# Altium PCB ESB32 with USBC PCB V1-1.PcbDoc (part 2 of 3)
Units mil, origin at the board's own origin, x right, y up, seen from the top; angles counter-clockwise.
Board outline 2700 x 1000 mil, 4 copper layers (L1, L2, L3, L4), stack 61.583 mil thick; 64 components, 73 nets, 299 pads, 161 vias.
Unrouted connection lines stored in the file: 13.
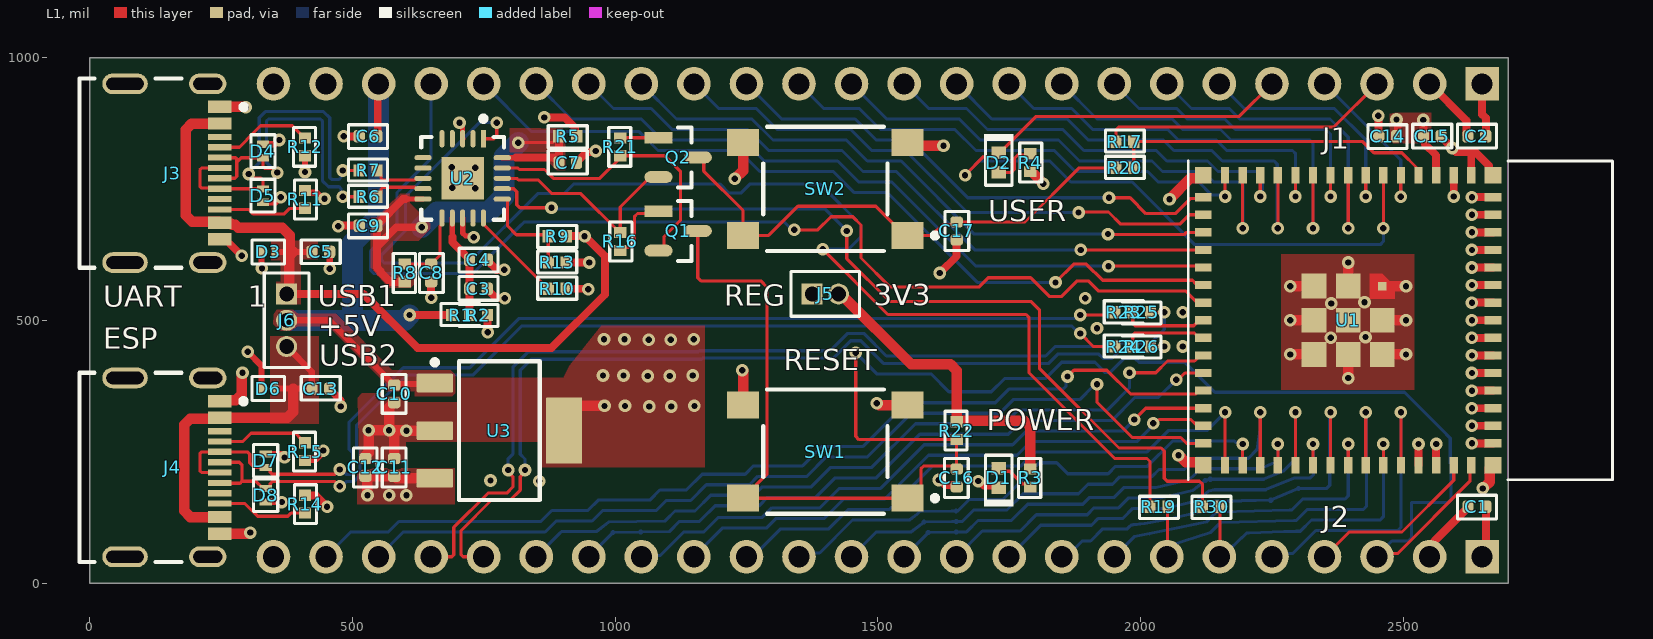
[diagram p0: L1 view]

## Part data (continued)
U2: "IC USB SERIAL FULL UART 20QFN", Case/Package=HVQCCN, LCSC Part number=C132159, Manufacturer=FTDI, Max Operating Temperature=85°C, Max Supply Current=8.4mA, Max Supply Voltage=5.5V, Min Operating Temperature=-40°C, Min Supply Voltage=2.97V, Nominal Supply Voltage=5V, Package Shape=Square, Package Style="CHIP CARRIER, HEAT SINK/SLUG, VERY THIN PROFILEMeter", Power Supplies=3.3/5V, Supplier Part Number=768-1128-1-ND, Temperature Grade=INDUSTRIAL, Category="Interface ICs", ComponentLink1Description=https://datasheet.ciiva.com:443/pdfs/VipMasterIC/IC/FTDI/FTDIS00099/FTDIS00099-1.pdf?src-supplier=IHS+Markit, ComponentLink1URL=https://datasheet.ciiva.com:443/pdfs/VipMasterIC/IC/FTDI/FTDIS00099/FTDIS00099-1.pdf?src-supplier=IHS+Markit, ComponentLink2Description=https://datasheet.ciiva.com/1787/ds-ft231x-1787312.pdf?src-supplier=Digikey, ComponentLink2URL=https://datasheet.ciiva.com/1787/ds-ft231x-1787312.pdf?src-supplier=Digikey, ComponentLink3Description=https://datasheet.ciiva.com/4787/ds-ft231x-13571-4787570.pdf?src-supplier=Mouser, ComponentLink3URL=https://datasheet.ciiva.com/4787/ds-ft231x-13571-4787570.pdf?src-supplier=Mouser, ComponentLink4Description=https://datasheet.ciiva.com/30475/0900766b811020d3-30475405.pdf?src-supplier=Rs, ComponentLink4URL=https://datasheet.ciiva.com/30475/0900766b811020d3-30475405.pdf?src-supplier=Rs, ComponentLink5Description=https://datasheet.ciiva.com/1787/ft-x-series-1787313.pdf?src-supplier=Digikey, ComponentLink5URL=https://datasheet.ciiva.com/1787/ft-x-series-1787313.pdf?src-supplier=Digikey, ComponentLink6Description=https://datasheet.ciiva.com/1787/ft-x-series-1787314.pdf?src-supplier=Digikey, ComponentLink6URL=https://datasheet.ciiva.com/1787/ft-x-series-1787314.pdf?src-supplier=Digikey, Height - Seated (Max)=0.8mm, JESD-30 Code=S-XQCC-N20, Length=4mm, Manufacturer Part Number=FT231XQ-R, Pins=20, Pricing="1=2,34, 25=2,27, 100=2,2, 250=2, 500=1,82002, 1000=1,7625, 5000=1,6779 (USD)", Qualification Status="Not Qualified", Reach SVHC Compliant=Yes, RoHS=Yes, RoHS Compliant=Yes, Stock=67, Supplier=Digikey, Surface Mount=Yes, Technology=CMOS, Terminal Form="No Lead", Terminal Pitch=0.5mm, Terminal Position=QUAD, Width=4mm
U3: "IC REG LIN 3.3V 1.5A SOT-223-4", Case/Package=SOP, Dropout Voltage1-Max=550mV, Dropout Voltage1-Nom=340mV, LCSC Part number=C181262, Manufacturer="Texas Instruments", Max Supply Voltage=20V, Min Input Voltage=3.8V, Operating Temperature, TJ-Max=125°C, Operating Temperature, TJ-Min=-40°C, Output Current1-Max=1.5A, Output Voltage1-Max=3.4V, Output Voltage1-Min=3.2V, Output Voltage1-Nom=3.3V, Package Body Material=Plastic, Package Shape=Rectangular, Peak Reflow Temperature (Cel)=260°C, Supplier Part Number=296-24897-1-ND, Voltage Tolerance-Max=3%, Adjustability=FIXED, Category="Voltage Regulators - Linear", Channels=1, ComponentLink1Description=https://www.ti.com:443/lit/ds/symlink/tl1963a.pdf?src-supplier=IHS+Markit, ComponentLink1URL=https://www.ti.com:443/lit/ds/symlink/tl1963a.pdf?src-supplier=IHS+Markit, ComponentLink2Description=https://datasheet.ciiva.com/2046/-2046068.pdf?src-supplier=Digikey, ComponentLink2URL=https://datasheet.ciiva.com/2046/-2046068.pdf?src-supplier=Digikey, Height - Seated (Max)=1.8mm, JESD-30 Code=R-PDSO-G4, JESD-609 Code=e3, Length=6.5mm, Manufacturer Part Number=TL1963A-33DCYR, Moisture Sensitivity Level=2, Number of Outputs=1, Packaging="Tape and Reel", Pins=4, Pricing="1=3,13, 10=2,344, 25=2,1476, 100=1,9323, 250=1,82956, 500=1,76766, 1000=1,71669, 2500=1,66289, 5000=1,63048 (USD)", Qualification Status="Not Qualified", Reach SVHC Compliant=Yes, Regulator Type="FIXED POSITIVE SINGLE OUTPUT LDO REGULATOR", RoHS=Yes, RoHS Compliant=Yes, Stock=4787, Supplier=Digikey, Surface Mount=Yes, Technology=BIPOLAR, Terminal Finish=Tin, Terminal Form="Gull Wing", Terminal Pitch=2.3mm, Terminal Position=DUAL, Width=3.5mm, Input Voltage Absolute-Max=20V

## Via types
v1: diameter 24, hole 12, L1 to L4, tented both sides, 161 vias

## Nets (pads, with @x,y where several pads share a name; then routed paths per layer and width w, separated by ;. In a path a pad name is that pad's centre, name@x,y a point inside that pad or via, vN(x,y) a via of type N, cw(c..) or ccw(c..) an arc to the next point about the centre after c; other vN are vias at no path point)
+3V3: C1.1 C2.1 C14.1 C15.1 J1.2 J2.1 J5.2 R2.1 R3.2 R4.2 R5.1 R22.2 U1.3 | length 4918.6
  L1 w15: R2.1@757.01,510 757.01,477.99 v1(758,477) ; v1(865,886) 904.18,886 923.88,866.3 923.88,853.13 R5.1@927.01,850 ; C14.1@2486.93,850 2489.3,852.37 2489.3,877.26 2487,879.56 v1(2487,882) ; v1(2538,881) v1(2538,881) 2538.04,850.04 2541.2,846.87 2541.2,835 2562.36,813.84 U1.3@2562.36,775.59 ; J1.2@2550,950 2619.94,880.06 2619.94,853.13 C2.1@2623.07,850 ; J2.1@2650,50 2656.93,56.93 C1.1@2656.93,145
  L1 w20: J5.2@1425,550 1429.47,550 1563.47,416 1638.28,416 1650,404.28 R22.2@1650,307.01 ; R22.2@1652,309.01 1778.28,309.01 1790,297.29 R3.2@1790,217.01 ; R4.2@1790,782.99 1790.63,782.36 1792.64,782.36 v1(1815,760)
  L2 w15: v1(2487,882) 2487.5,881.5 2537.5,881.5 v1(2538,881)
  L2 w20: 2500.5,843.5 2500.5,774.75 2594.36,680.89 2594.36,105.64 J2.1@2650,50
  L2 w40: v1(758,477) 813.57,477 837,500.43 837,755 861,779 861,882 v1(865,886) 868,889 923.32,889 948.32,864 1030,864 1170,724 1204.6,724 ; 1210.6,727 1245.4,727 1251.4,733 1513,733 1791.57,733 1815,756.43 v1(1815,760) 1861,806 2463,806 2500.5,843.5 v1(2538,881) 2545.41,888.41 2545.41,945.41 J1.2@2550,950 ; 1245.4,724 1513,724 1513,577.43 1489.57,554 1429,554 J5.2@1425,550
+3V3_FTDI: C7.1 C9.1 R5.2 R8.1 U2.10 U2.20 | length 894.8
  L1 w6: v1(816,838) 880.99,838 886.18,843.19 887.36,843.19 892.99,848.82 R5.2@892.99,850 R5.2@892.99,850 ; C7.1@893.07,800 C7.1@893.03,800.04
  L1 w10.01: 601,731 601.37,730.63 U2.10@634.59,730.63 ; U2.20@785.41,809.37 811.63,809.37
  L1 w15: R8.1@600,572.99 572.01,572.99 554,591 554,593.44 546.93,600.51 546.93,640.25 ; 601,731 596.75,731 546.93,681.18 C9.1@546.93,680 546.93,640.25 ; v1(632,677) 583.68,677 546.93,640.25 ; 811.63,809.37 883.7,809.37 888.76,804.31 889.94,804.31 893.07,801.18 C7.1@893.07,800 ; C7.1@893.03,800.04 R5.2@892.99,850
  L4 w40: v1(632,677) 660.81,705.81 758.81,705.81 788.37,735.37 788.37,810.37 v1(816,838)
+3V3_REG: C11.1 C12.1 J5.1 U3.3 | length 1316.5
  L1 w20: v1(529,167) 528.23,167.77 528.23,199.84 526.81,201.26 526.81,202.44 526.18,203.07 C12.1@525,203.07 C11.1@580,203.07 ; C11.1@581.18,203.07 584.8,199.45 U3.3@656.97,199.45
  L2 w40: v1(529,167) v1(570,167) v1(603,167) 622,167 675,220 ; 1334,516 1341,516 J5.1@1375,550
  L2 w60: 675,220 737,282 1336.85,282 1334,284.85 1334,516
+5V: C6.1 C10.2 J1.22 J6.2 R1.1 U3.1 | length 1224.5
  L1 w12: J6.2@375,500 455.75,500 578.82,376.93 C10.2@580,376.93 581.81,378.74 655.16,378.74 U3.1@656.97,380.55
  L1 w15: C6.1@546.93,850 548.46,851.54 548.46,948.46 J1.22@550,950 ; v1(609,510) R1.1@688.98,510
  L4 w40: J6.2@375,500 500,500 ; J1.22@550,950 550,696.6 500,646.6 500,500 ; v1(609,510) 599,500 500,500
+5VBUS_1: C5.1 D3.2 J3.A4B9 J3.B4A9 J6.1 R9.1 | length 1486.8
  L1 w12: D3.2@352.8,630 379.69,630 ; 387.93,630 C5.1@423.07,630
  L1 w15: J6.1@375,550 521.36,550 623.86,447.5 879.22,447.5 980.5,548.78 980.5,622.22 942.72,660 v1(942,660) R9.1@907.01,660
  L1 w20: J3.A4B9@247.64,874.41 194.72,874.41 183,862.69 183,699.72 195.47,687.24 245.83,687.24 249.45,683.62 269.76,683.62 271.63,681.75 276.9,681.75 282.65,676 307,676 367,676 381,662 381,623.07 379.69,621.75 ; J6.1@375,550 379.69,554.69 379.69,621.75 ; 387.93,630 379.69,621.75
+5VBUS_2: C13.1 D6.2 J4.A4B9 J4.B4A9 J6.3 | length 668.5
  L1 w12: D6.2@352.8,370 387.93,370 C13.1@423.07,370 423.07,401.93 J6.3@375,450
  L1 w20: J4.B4A9@247.64,125.59 191.72,125.59 180,137.31 180,301.04 191.72,312.76 245.83,312.76 J4.A4B9@247.64,314.57 376.22,314.57 387.93,326.28 387.93,370
+VCC_FTDI: C3.1 C4.2 R1.2 R2.2 U2.12 | length 198.2
  L1 w10.01: 690.32,658.68 U2.12@690.32,694.59
  L1 w15: 690.32,658.68 690.32,648.94 723.07,616.18 C4.2@723.07,615 C3.1@723.07,560 723.03,559.96 R1.2@722.99,510 R1.2@722.99,510
BTN_GPIO0: C17.1 Q2.3 R20.1 SW2.1 SW2.2 | length 996.3
  L1 w6: Q2.3@1157.42,810 1162.98,810 1168.76,804.21 1168.76,783.74 1243.5,709 SW2.2@1243.5,661.42 1292.23,661.42 1347.82,717 1495.99,717 1551.57,661.42 SW2.1@1556.5,661.42 1602.49,661.42 1623.19,682.12 1645.19,682.12 C17.1@1650,686.93 1780.11,686.93 1883.18,790 R20.1@1952.99,790
CHIP_PU: C16.2 J2.3 Q1.3 R22.1 SW1.1 SW1.2 U1.45 | length 3394.4
  L1 w6: Q1.3@1157.42,670 1157.42,580.86 1163.28,575 1277.14,575 1289.02,563.13 1289.02,206.93 1269.02,186.93 1269.02,182.01 1248.43,161.42 SW1.2@1243.5,161.42 1561.42,161.42 1582.01,182.01 1582.01,217.14 1587.87,223 1642.41,223 1648.48,216.93 1650,218.45 R22.1@1650,272.99 1464.01,272.99 1458,279 v1(1458,438) ; J2.3@2450,50 2456,56 2489,56 2626.66,193.66 2626.66,221.78 U1.45@2629.29,224.41
  L4 w6: v1(1458,438) 1498,398 1601.18,398 1635.18,364 1716.16,364 1741.16,389 1818.82,389 1849.82,420 1913.18,420 1932.86,400.33 1941.14,400.33 1967.82,427 1990.18,427 1997.18,420 2084.4,420 2141.4,363 2502.11,363 2573.55,291.57 2589.36,275.75 2589.36,227.36 2591,225.72 2591,159.29 2585.14,153.43 2515.43,153.43 2515.43,85.86 2509.58,80 2478.18,80 2450,51.82 J2.3@2450,50
CON1_USB_N: D4.2 J3.A7 J3.B7 R6.1 | length 625
  L1 w6.03: J3.A7@247.64,770.08 276.47,770.08 280,773.61 280,807.33 278,809.33 247.76,809.33 J3.B7@247.64,809.45 ; 280.42,800.93 288.82,809.33 329.88,809.33 D4.2@330,809.2 330,792.64 333.53,789.11 353.47,789.11 357,785.58 v1(357,781) ; v1(482,735) R6.1@512.99,735
  L4 w6.03: v1(357,781) 355.7,781 336.92,799.78 336.92,879.47 340.45,883 439.47,883 443,879.47 443,765.72 454.75,753.97 475,753.97 478.56,750.41 478.56,738.44 v1(482,735)
CON1_USB_P: D5.2 J3.A6 J3.B6 R7.1 | length 677
  L1 w6.03: J3.A6@247.64,789.76 213.53,789.76 210,786.23 210,755.06 213.53,751.53 246.5,751.53 J3.B6@247.64,750.39 247.83,750.2 D5.2@329.8,750.2 ; v1@306.34,770.29 326.27,770.29 329.8,766.76 D5.2@329.8,750.2 ; D5.2@330,750 D5.2@329.8,750.2 ; v1(482,785) R7.1@512.99,785
  L4 w6.03: v1(302.8,778.4) 302.8,779.7 322.89,799.78 322.89,885.28 334.64,897.03 445.28,897.03 457.03,885.28 457.03,771.53 460.56,768 475,768 478.56,771.56 478.56,781.56 v1(482,785)
CON2_USB_N: D7.2 J4.A7 J4.B7 R23.1 | length 2046.3
  L1 w6.03: J4.A7@247.64,210.24 213.53,210.24 210,213.77 210,246.07 213.53,249.61 J4.B7@247.64,249.61 247.64,248.37 248.87,249.61 300.39,249.61 305,245 305,228.53 313.53,220 D7.2@335,220 339.92,220 343.8,216.13 343.8,210.55 347.33,207.01 467,207.01 v1(476,216) ; v1(1885,510) 1945.98,510 R23.1@1950.98,515
  L4 w6.03: v1(476,216) 479.53,216 488.52,207.01 496.78,207.01 500.31,210.55 500.31,248.25 493.95,254.61 493.95,306.34 597.3,409.69 723.23,409.69 816.65,503.1 1873.24,503.1 1880.14,510 v1(1885,510)
CON2_USB_P: D8.2 J4.A6 J4.B6 R24.1 | length 2006.5
  L1 w6.03: J4.B6@247.64,190.55 248.19,190 286.47,190 290,193.53 ; J4.A6@247.64,229.92 285.08,229.92 290,225 290,193.53 ; v1(476,184) 467,192.99 347.33,192.99 343.8,189.45 343.8,183.87 339.92,180 D8.2@335,180 330.08,180 316.55,193.53 290,193.53 ; v1(1885,475) 1910,450 R24.1@1950.98,450
  L4 w6.03: v1(476,184) 479.53,184 488.52,192.99 502.59,192.99 514.34,204.74 514.34,254.07 507.99,260.42 507.99,300.53 603.11,395.66 729.04,395.66 822.46,489.08 1868.89,489.08 1882.97,475 v1(1885,475)
CON_ESP_USB_N: J2.21 R25.1 | length 1848.7
  L1 w6.03: J2.21@650,50 689.45,50 692.99,53.53 692.99,105.83 758.19,171.03 793.91,171.03 805.55,182.67 805.55,202.48 796.56,211.47 v1(796.56,215) ; R25.1@2018.98,515 v1(2045,515)
  L4 w6.03: v1(796.56,215) 796.56,236.4 805.55,245.39 805.55,410.81 834.72,439.99 1158.53,439.99 1160.59,442.05 1409.66,442.05 1442.66,475.05 1473.34,475.05 1516.39,432 1819.33,432 1837.37,450.04 1925.63,450.04 1934.5,441.17 1939.5,441.17 1955.37,457.05 2002.63,457.05 2004.17,455.5 2017.99,455.5 2045,482.52 v1(2045,515)